# EAGLE board SparkFun-74HC4051-8-Channel-Mux-Breakout (EAGLE 9.6.2)
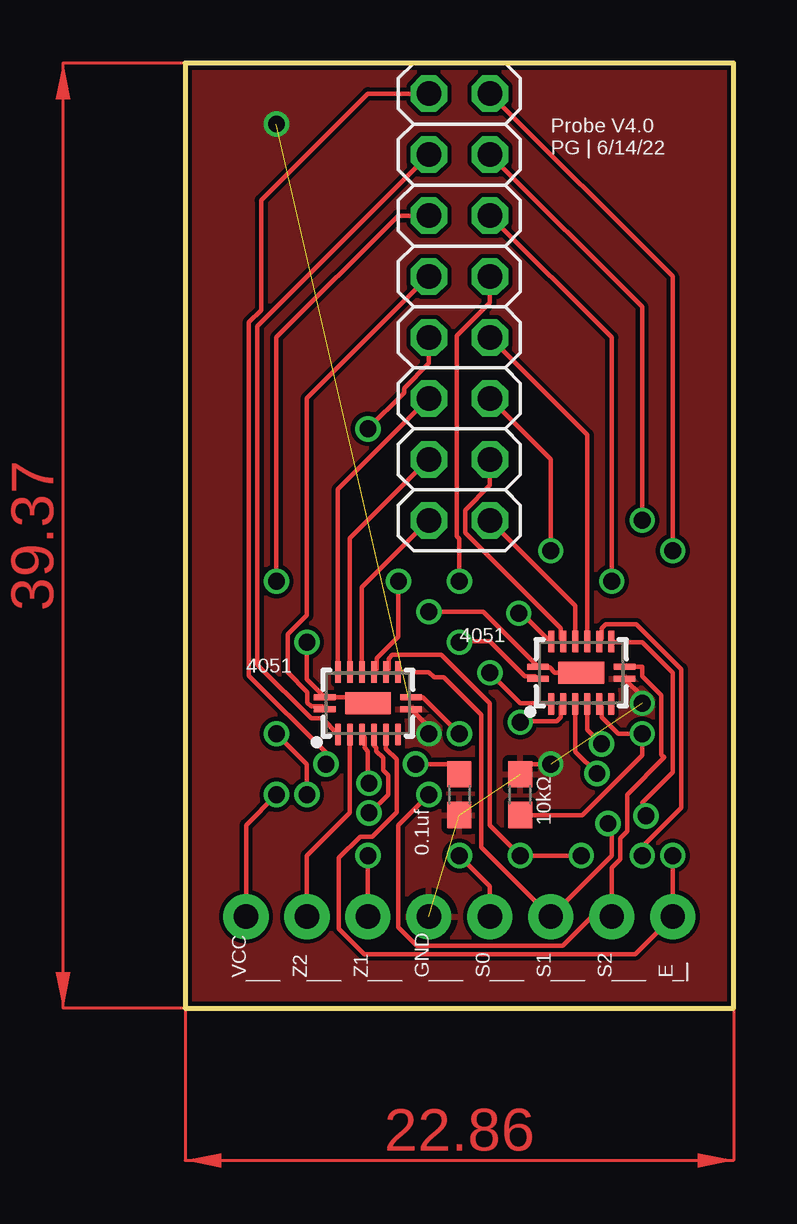
[diagram p0: board, top side]
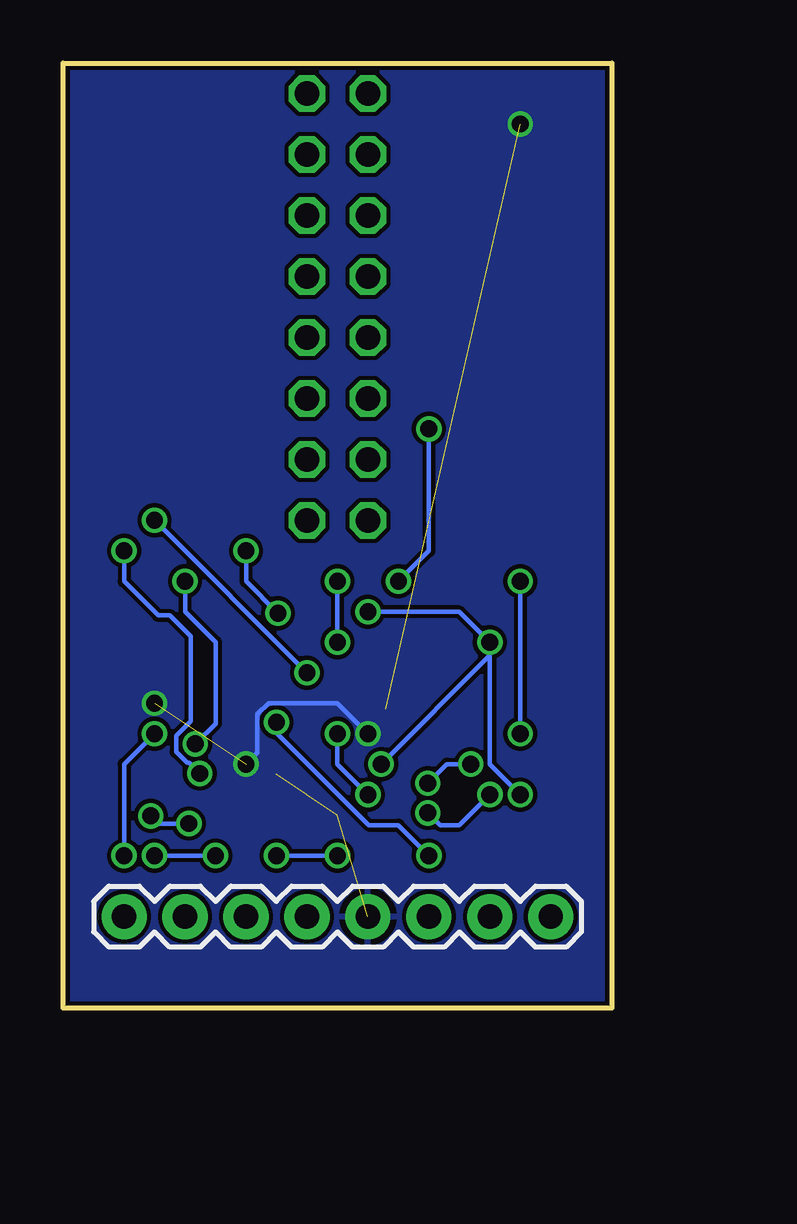
[diagram p1: board, bottom side, seen from below]

Size 22.86 x 39.37 mm. Coordinates in mm from the lower left corner, seen from the top.
Outline: 0,39.37 0,0 22.86,0 22.86,39.37 0,39.37
Copper layers (1*16): Top 0.035mm / dielectric 1.5mm / Bottom 0.035mm
Design rules "SparkFun-2-layer-TIGHT": minimum track width 7mil, minimum drill 15mil, track to track 7mil, track to pad 7mil, pad to pad 7mil, via to via 7mil, smd to smd 7mil, copper to edge 7mil, drill to drill 7mil, minimum pad ring 7mil, minimum via ring 7mil, stop-mask expansion 4mil, vias tented up to drill 25mil, thermal gap 10mil

## Footprints (pad centres in the part's own frame; a part is rotated, then mirrored left to right if it is on the bottom)
0603 = smd 1.1 x 1: 1 -0.85,0; 2 0.85,0
1X08_ROUND = drill 1.016 pad 1.88: 1 0,0; 2 2.54,0; 3 5.08,0; 4 7.62,0; 5 10.16,0; 6 12.7,0; 7 15.24,0; 8 17.78,0
2X08 = drill 1.016 octagon: 1 -8.89,-1.27; 2 -8.89,1.27; 3 -6.35,-1.27; 4 -6.35,1.27; 5 -3.81,-1.27; 6 -3.81,1.27; 7 -1.27,-1.27; 8 -1.27,1.27; 9 1.27,-1.27; 10 1.27,1.27; 11 3.81,-1.27; 12 3.81,1.27; 13 6.35,-1.27; 14 6.35,1.27; 15 8.89,-1.27; 16 8.89,1.27
DHVQFN-16-2.5X3.5MM = smd 0.9 x 0.24: 1 -1.8,-0.25; 8 1.8,-0.25; 9 1.8,0.25; 16 -1.8,0.25 | smd 0.24 x 0.9: 2 -1.25,-1.3; 3 -0.75,-1.3; 4 -0.25,-1.3; 5 0.25,-1.3; 6 0.75,-1.3; 7 1.25,-1.3; 10 1.25,1.3; 11 0.75,1.3; 12 0.25,1.3; 13 -0.25,1.3; 14 -0.75,1.3; 15 -1.25,1.3 | smd 1.9 x 0.9: EP 0,0

## Placement (x,y rotation side)
C1  0.1uF  [0603]  11.43,8.89 270 top
J2  [1X08_ROUND]  20.32,3.81 0 bottom
JP1  [2X08]  11.43,29.21 90 top
R1  10k  [0603]  13.97,8.89 90 top
U1  74HC4051BQ  [DHVQFN-16-2.5X3.5MM]  16.51,13.97 0 top
U2  74HC4051BQ  [DHVQFN-16-2.5X3.5MM]  7.62,12.7 0 top

## Library data of the parts
C1 = SparkFun-Capacitors; PROD_ID: CAP-00810
J2 = SparkFun-Connectors; PROD_ID: CONN-08437
JP1 = pinhead
R1 = SparkFun-Resistors; PROD_ID: RES-00824
U1 U2 = 8mux; PROD_ID: IC-13334

## Nets
E: J2.1 R1.1 U1.6 U2.6
GND: C1.2 J2.5 R1.2 U1.8 U2.8
S0: J2.4 U1.11 U2.11
S1: J2.3 U1.10 U2.10
S2: J2.2 U1.9 U2.9
VCC: C1.1 J2.8 U1.16 U1.EP U2.16 U2.EP
Y0: JP1.1 U1.13
Y1: JP1.3 U1.14
Y2: JP1.5 U1.15
Y3: JP1.7 U1.12
Y4: JP1.9 U1.1
Y5: JP1.11 U1.5
Y6: JP1.13 U1.2
Y7: JP1.15 U1.4
Y20: JP1.2 U2.13
Y21: JP1.4 U2.14
Y22: JP1.6 U2.15
Y23: JP1.8 U2.12
Y24: JP1.10 U2.1
Y25: JP1.12 U2.5
Y26: JP1.14 U2.2
Y27: JP1.16 U2.4
Z: J2.6 U1.3
Z2: J2.7 U2.3

## Tracks (layer width: path | path; a pad name or v marks a point on that pad's centre or on a via)
E  (via drill 0.7)
  Top 0.178: v20.32,6.35 J2.1 18.76,2.25 7.48,2.25 6.41,3.31 6.41,6.27 7.29,7.14 7.8,7.14 8.81,8.16 8.81,10.37 8.37,10.81 U2.6 | U1.6 17.37,12.56 17.37,12.11 18.05,11.43 v19.05,11.43 19.05,10.53 16.56,8.04 R1.1
  Bottom 0.178: v19.05,11.43 20.32,10.16 v20.32,6.35
GND  (via drill 0.7)  (4 unrouted)
  Top 0.178: U2.8 10.16,11.71 v10.16,11.43 | R1.2 14.39,10.16 v15.24,10.16 | v19.05,12.7 19.05,12.98 U1.8
  Bottom 0.178: v15.24,10.16 14.76,10.63 14.76,12.24 14.3,12.7 11.43,12.7 v10.16,11.43
  other vias: 3.81,36.83
  pour Top: 0,0 0,39.37 22.86,39.37 22.86,0
  pour Bottom: 0,0 0,39.37 22.86,39.37 22.86,0
S0  (via drill 0.7)
  Top 0.178: U2.11 8.48,14.11 8.48,14.56 8.64,14.72 10.68,14.72 12.7,12.7 12.7,7.62 v13.97,6.35 v16.51,6.35 | v11.43,6.35 12.7,5.08 J2.4 | U1.11 17.37,15.38 17.37,15.83 17.53,15.99 18.81,15.99 20.68,14.12 20.68,8.35 19.05,6.72 v19.05,6.35
  Bottom 0.178: v16.51,6.35 v19.05,6.35 | v11.43,6.35 v13.97,6.35
S1  (via drill 0.7)
  Top 0.178: U1.10 17.79,15.24 19.05,15.24 20.32,13.97 20.32,9.83 19.05,8.56 19.21,8.4 v19.21,8.01 | v17.62,7.69 17.78,7.53 17.78,6.35 J2.3 12.34,6.71 12.34,12.22 10.78,13.78 10.38,13.78 10.16,14 U2.10
  Bottom 0.178: v17.62,7.69 18.98,7.69 19.21,7.91 v19.21,8.01
S2  (via drill 0.7)
  Top 0.178: U1.9 19.05,14.22 19.05,13.82 19.84,13.03 19.84,10.56 19.96,10.44 18.41,8.89 18.41,7.36 18.14,7.08 18.14,6.2 17.78,5.85 J2.2 16.95,3.81 15.74,2.6 9.66,2.6 8.89,3.37 8.89,7.62 v10.16,8.89 | U2.9 9.91,12.95 v11.43,11.43
  Bottom 0.178: v11.43,11.43 11.43,10.16 v10.16,8.89
VCC  (via drill 0.7)
  Top 0.178: U2.EP 7.37,12.95 U2.16 5.08,13.69 v5.08,15.24 | U1.EP 15.41,13.97 15.19,14.19 14.74,14.19 U1.16 12.42,16.51 v10.16,16.51 | J2.8 2.54,7.62 v3.81,8.89 | C1.1 11.01,10.16 v9.61,10.16
  Bottom 0.178: v5.08,15.24 6.35,16.51 v10.16,16.51 | v5.08,15.24 5.08,10.16 v3.81,8.89 | v9.61,10.16 5.08,14.69 v5.08,15.24
Y0
  Top 0.178: JP1.1 16.26,16.76 U1.13
Y1
  Top 0.178: U1.14 15.65,15.38 15.65,15.83 11.67,19.81 11.67,20.75 12.7,21.78 JP1.3
Y2  (via drill 0.7)
  Top 0.178: JP1.5 15.24,22.86 v15.24,19.05 | U1.15 15.21,15.27 13.97,16.51 v13.91,16.45
  Bottom 0.178: v15.24,19.05 15.24,17.78 v13.91,16.45
Y3
  Top 0.178: JP1.7 16.76,23.88 U1.12
Y4  (via drill 0.7)
  Top 0.178: U1.1 14.6,13.83 14.15,13.83 12.7,15.28 11.47,15.28 v11.43,15.24 | JP1.9 12.7,29.39 11.32,28.01 11.32,19.66 11.43,19.54 v11.43,17.78
  Bottom 0.178: v11.43,17.78 v11.43,15.24
Y5  (via drill 0.7)
  Top 0.178: JP1.11 17.78,27.94 v17.78,17.78 | v17.36,11.01 16.76,11.6 U1.5
  Bottom 0.178: v17.78,17.78 17.78,16.51 16.51,15.24 16.51,11.85 v17.36,11.01
Y6  (via drill 0.7)
  Top 0.178: v12.7,13.97 13.97,12.7 15.23,12.7 U1.2 | v19.05,20.32 19.05,29.21 JP1.13
  Bottom 0.178: v12.7,13.97 v19.05,20.32
Y7  (via drill 0.7)
  Top 0.178: v17.17,9.77 16.26,10.68 U1.4 | JP1.15 20.32,30.48 v20.32,19.05
  Bottom 0.178: v20.32,19.05 20.32,17.78 18.9,16.36 18.41,16.36 17.54,15.48 17.54,11.95 18.15,11.33 18.15,10.68 17.68,10.21 17.61,10.21 v17.17,9.77
Y20
  Top 0.178: JP1.2 7.37,17.53 U2.13
Y21
  Top 0.178: JP1.4 6.87,19.57 U2.14
Y22
  Top 0.178: JP1.6 6.37,21.61 U2.15
Y23  (via drill 0.7)
  Top 0.178: v7.62,24.13 9.13,25.64 9.13,25.83 10.16,26.86 JP1.8 | U2.12 7.98,14.11 7.98,14.56 8.89,15.47 v8.89,17.78
  Bottom 0.178: v7.62,24.13 7.62,19.05 v8.89,17.78
Y24
  Top 0.178: U2.1 5.71,12.56 5.26,12.56 5.1,12.72 5.1,13.17 4.29,13.98 4.29,15.57 5.08,16.36 5.08,25.4 JP1.10
Y25  (via drill 0.7)
  Top 0.178: JP1.12 8.89,33.02 3.81,27.94 v3.81,17.78 | v3.81,11.43 5.08,10.16 v5.08,8.89 | v7.66,8.13 7.7,8.13 8.46,8.89 8.46,9.69 8.25,9.9 8.25,10.42 7.98,10.7 7.98,10.85 7.87,10.96 U2.5
  Bottom 0.178: v3.81,17.78 v3.81,11.43 | v5.08,8.89 6.35,7.62 7.15,7.62 v7.66,8.13
Y26
  Top 0.178: U2.2 5.71,12.06 5.26,12.06 3.02,14.3 3.02,28.42 JP1.14
Y27  (via drill 0.7)
  Top 0.178: JP1.16 7.62,38.1 3.17,33.65 3.17,29.08 2.66,28.56 2.66,13.85 5.88,10.63 v5.88,10.16 | U2.4 7.48,11.29 7.48,10.84 7.62,10.7 7.62,9.41 v7.66,9.36
  Bottom 0.178: v7.66,9.36 6.87,10.16 v5.88,10.16
Z  (via drill 0.7)
  Top 0.178: J2.6 v7.62,6.35 | U1.3 15.65,12.56 15.65,12.11 15.49,11.95 14.02,11.95 v13.97,11.91
  Bottom 0.178: v7.62,6.35 8.89,7.62 10.12,7.62 13.97,11.47 v13.97,11.91
Z2
  Top 0.178: U2.3 6.87,8.14 5.08,6.35 J2.7
(copper drawn outside any net)
  shapes: Top area x2

## Text on the board
tPlace: Probe V4.0 / PG | 6/14/22
tNames: 4051 | 4051 | 10kΩ | 0.1uf | VCC | ___ | Z2 | ___ | Z1 | ___ | GND | ___ | S0 | ___ | S1 | ___ | S2 | ___ | E | _|